# Altium PCB Relay 1.PcbDoc
Units mil, origin at the board's own origin, x right, y up, seen from the top; angles counter-clockwise.
Board outline 6702.94 x 3280.03 mil, 2 copper layers (Top Layer, Bottom Layer); 67 components, 114 nets, 294 pads, 0 vias.
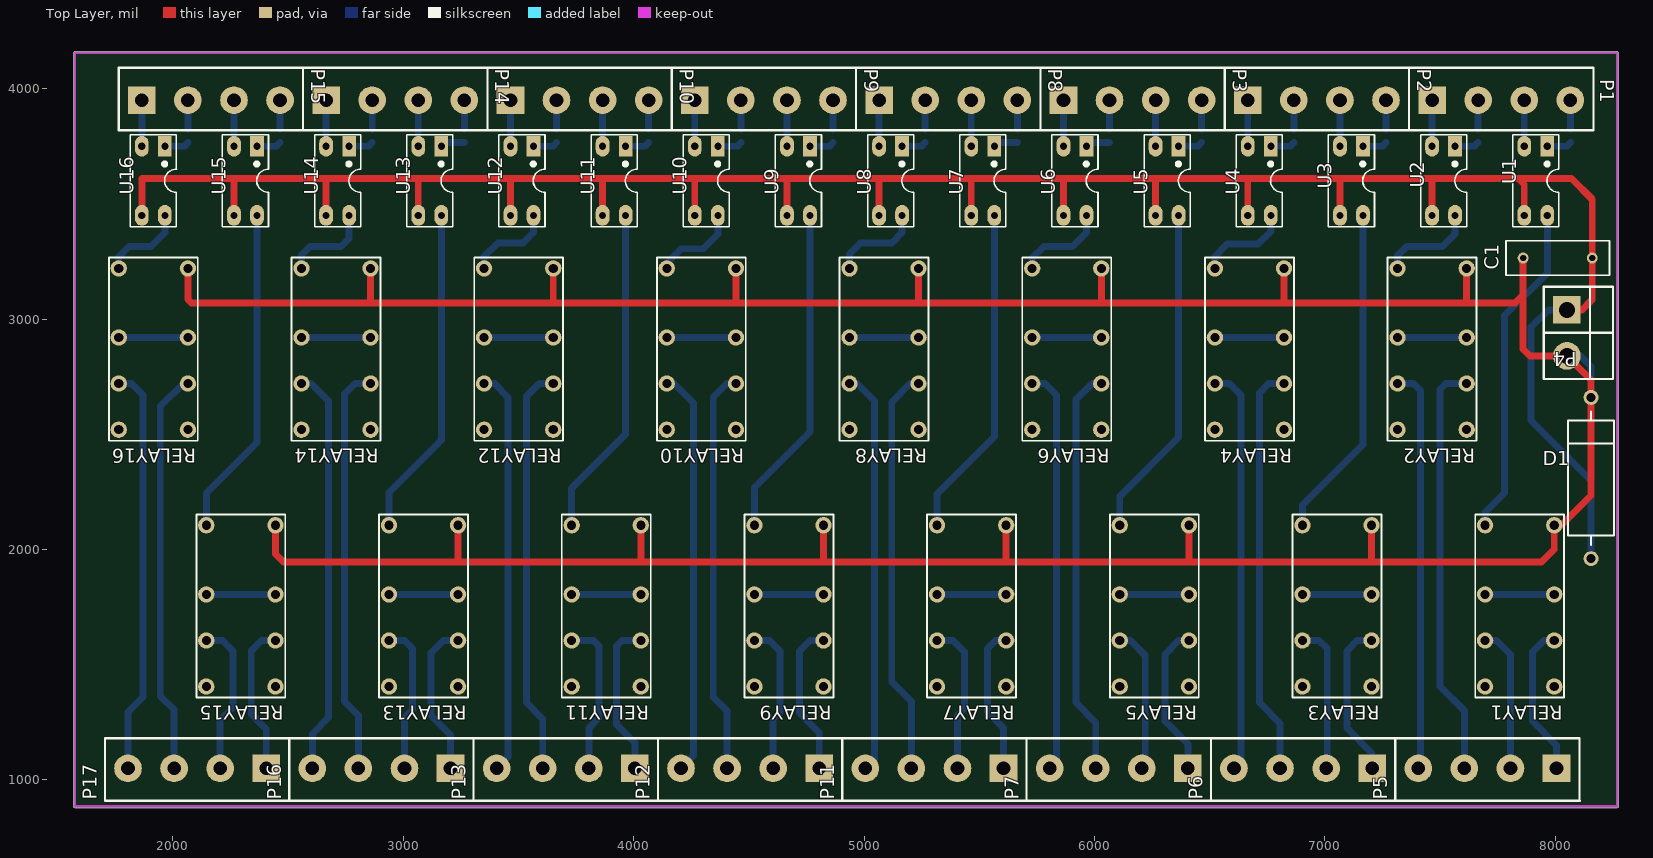
[diagram p0: Top Layer view]
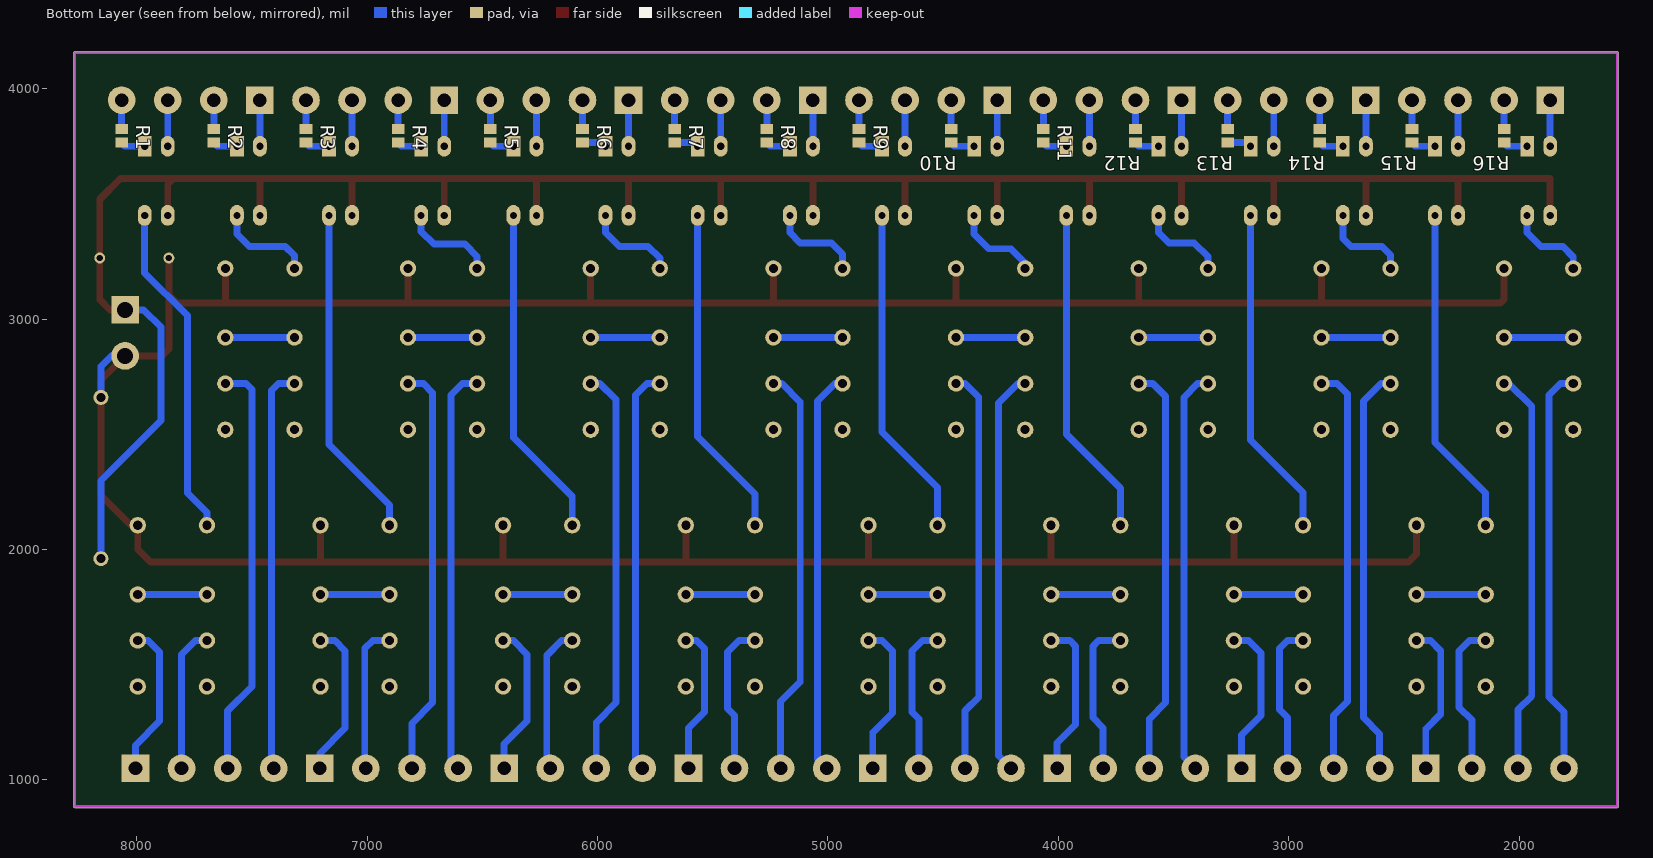
[diagram p1: Bottom Layer view, seen from below]

## Layer stack, top to bottom
Top Solder: solder mask 0.4, Solder Resist, Dk 3.5
Top Layer: signal copper 1.4
Dielectric 1: dielectric 12.6, FR-4, Dk 4.8
Bottom Layer: signal copper 1.4
Bottom Solder: solder mask 0.4, Solder Resist, Dk 3.5

## Board outline
1569.92,886.14 cw(c1574.8,887.28) 1569.79,887.28 1569.79,4155 cw(c1574.8,4155) 1574.8,4160.02 8267.72,4160.02 cw(c8267.72,4155) 8272.73,4155 8272.73,887.28 cw(c8267.72,887.28) 8272.6,886.14 cw(c8267.72,885) 8272.73,885 cw(c8267.72,885) 8267.72,879.99 1574.8,879.99 cw(c1574.8,885)

## Design rules (kind name [scope] priority, off if disabled: settings)
Clearance [All] p1: gap=10 ignorepadtopadclearanceinfootprint=FALSE except(0: Arc-Hole Track-Hole SMDPad-Hole THPad-Hole Via-Hole Fill-Hole Poly-Hole Region-Hole Text-Hole)
PolygonConnect [All] p1: connectstyle=Relief reliefconductorwidth=10 reliefentries=4 polygonreliefangle="90 Angle" airgapwidth=10
RoutingVias [All] p1: holewidth=28 width=50 viastyle="Through Hole" minholewidth=28 minwidth=50 maxholewidth=28 maxwidth=50
SolderMaskExpansion [All] p1: expansion=4
Width [All] p1: maxlimit=50 minlimit=10 preferedwidth=30
30 further rules are at their usual default settings.

## Components (designator, comment, footprint, x,y, rotation, side; value= is the part's Value field where it differs from the comment)
C1 "Cap" RAD-0.3 8010,3265 r180 top
D1 "D Zener" DIODE-0.7 8155,2310 r90 top
P1 "Header 4" CON4 7465,3950 r0 top
P2 "Header 4" CON4 6665,3950 r0 top
P3 "Header 4" CON4 5865,3950 r0 top
P4 "Header 2" CON2 8050,3040 r270 top
P5 "Header 4" CON4 8005,1050 r180 top
P6 "Header 4" CON4 7205,1050 r180 top
P7 "Header 4" CON4 6405,1050 r180 top
P8 "Header 4" CON4 5065,3950 r0 top
P9 "Header 4" CON4 4265,3950 r0 top
P10 "Header 4" CON4 3465,3950 r0 top
P11 "Header 4" CON4 5605,1050 r180 top
P12 "Header 4" CON4 4805,1050 r180 top
P13 "Header 4" CON4 4005,1050 r180 top
P14 "Header 4" CON4 2665,3950 r0 top
P15 "Header 4" CON4 1865,3950 r0 top
P16 "Header 4" CON4 3205,1050 r180 top
P17 "Header 4" CON4 2405,1050 r180 top
R1 "Res3" C0805 8065,3795 r270 bottom
R2 "Res3" C0805 7665,3795 r270 bottom
R3 "Res3" C0805 7265,3795 r270 bottom
R4 "Res3" C0805 6865,3795 r270 bottom
R5 "Res3" C0805 6465,3795 r270 bottom
R6 "Res3" C0805 6065,3795 r270 bottom
R7 "Res3" C0805 5665,3795 r270 bottom
R8 "Res3" C0805 5265,3795 r270 bottom
R9 "Res3" C0805 4865,3795 r270 bottom
R10 "Res3" C0805 4465,3795 r270 bottom
R11 "Res3" C0805 4065,3795 r270 bottom
R12 "Res3" C0805 3665,3795 r270 bottom
R13 "Res3" C0805 3265,3795 r270 bottom
R14 "Res3" C0805 2865,3795 r270 bottom
R15 "Res3" C0805 2465,3795 r270 bottom
R16 "Res3" C0805 2065,3795 r270 bottom
RELAY1 "RY12W-K" RY-Series 7695,2105 r270 top
RELAY2 "RY12W-K" RY-Series 7315,3220 r270 top
RELAY3 "RY12W-K" RY-Series 6902.14,2105 r270 top
RELAY4 "RY12W-K" RY-Series 6522.14,3220 r270 top
RELAY5 "RY12W-K" RY-Series 6109.29,2105 r270 top
RELAY6 "RY12W-K" RY-Series 5729.29,3220 r270 top
RELAY7 "RY12W-K" RY-Series 5316.43,2105 r270 top
RELAY8 "RY12W-K" RY-Series 4936.43,3220 r270 top
RELAY9 "RY12W-K" RY-Series 4523.57,2105 r270 top
RELAY10 "RY12W-K" RY-Series 4143.57,3220 r270 top
RELAY11 "RY12W-K" RY-Series 3730.71,2105 r270 top
RELAY12 "RY12W-K" RY-Series 3350.71,3220 r270 top
RELAY13 "RY12W-K" RY-Series 2937.86,2105 r270 top
RELAY14 "RY12W-K" RY-Series 2557.86,3220 r270 top
RELAY15 "RY12W-K" RY-Series 2145,2105 r270 top
RELAY16 "RY12W-K" RY-Series 1765,3220 r270 top
U1 "OPTO" DIP4/W0.3 7965,3750 r180 top
U2 "OPTO" DIP4/W0.3 7565,3750 r180 top
U3 "OPTO" DIP4/W0.3 7165,3750 r180 top
U4 "OPTO" DIP4/W0.3 6765,3750 r180 top
U5 "OPTO" DIP4/W0.3 6365,3750 r180 top
U6 "OPTO" DIP4/W0.3 5965,3750 r180 top
U7 "OPTO" DIP4/W0.3 5565,3750 r180 top
U8 "OPTO" DIP4/W0.3 5165,3750 r180 top
U9 "OPTO" DIP4/W0.3 4765,3750 r180 top
U10 "OPTO" DIP4/W0.3 4365,3750 r180 top
U11 "OPTO" DIP4/W0.3 3965,3750 r180 top
U12 "OPTO" DIP4/W0.3 3565,3750 r180 top
U13 "OPTO" DIP4/W0.3 3165,3750 r180 top
U14 "OPTO" DIP4/W0.3 2765,3750 r180 top
U15 "OPTO" DIP4/W0.3 2365,3750 r180 top
U16 "OPTO" DIP4/W0.3 1965,3750 r180 top

## Footprints (in the part's own frame and the unit in brackets; to place one, negate y for a bottom-side part, rotate by r counter-clockwise, add the part's x,y. Pads: shape width x height; smd on the part's side, far side on the other; paste and mask are expansions set on the pad)
C0805 [mm] "Chip Capacitor, Body 2.0x1.3mm, IPC High Density"
  rect 1.1x1.4 smd: 1(-0.75,0) 2(0.75,0)
  body extent -1.1,-0.72 1.1,0.72, height 1.4
CON2 [mil]
  rect 120x120 hole 70: 1(0,0)
  round 120 hole 70: 2(200,0)
  silkscreen extent -100,-100 300,200
CON4 [mil] "CON4 5.08"
  rect 120x120 hole 59.06: 1(0,0)
  round 120 hole 59.06: 2(200,0) 3(400,0) 4(600,0)
  silkscreen extent -101,-131 700,141
DIODE-0.7 [mm] "Diode, Thru-Hole; 2 Leads; 0.7 in Pin Spacing"
  round 1.65 hole 1: 1(-8.89,0) 2(8.89,0)
  silkscreen extent -7.37,-2.54 7.37,2.54
DIP4/W0.3 [mil] "4 PIN, W 300mil, Pin to pin 100mil"
  rect 60x90 hole 31: 1(0,0)
  oval 60x90 hole 31: 2(100,0) 3(100,300) 4(0,300)
  silkscreen extent -50,-50 150,350, body extent -59,-10 159,305, height 170
RAD-0.3 [mm] "Radial Cap, Thru-Hole; 2 Leads; 0.3 in Pin Spacing"
  round 1.2 hole 0.7: 1(-3.81,0) 2(3.81,0)
  silkscreen extent -5.71,-1.91 5.71,1.91
RY-Series [mm]
  round 1.8 hole 1: 1(0,0) 2(7.62,0) 3(12.7,0) 4(17.78,0) 5(17.78,7.62) 6(12.7,7.62) 7(7.62,7.62) 8(0,7.62)
  silkscreen extent -1.2,-1.09 19,8.71, body extent -1.16,-1.04 19.06,8.76, height 12.5

## Part data
C1: "Capacitor"
D1: "Zener Diode"
P1 P2 P3 P5 P6 P7 P8 P9 P10 P11 P12 P13 P14 P15 P16 P17: "Header, 4-Pin"
P4: "Header, 2-Pin"
R1 R2 R3 R4 R5 R6 R7 R8 R9 R10 R11 R12 R13 R14 R15 R16: "Resistor"
U1 U2 U3 U4 U5 U6 U7 U8 U9 U10 U11 U12 U13 U14 U15 U16: library part OPTO_PC817

## Nets (pads, with @x,y where several pads share a name; then routed paths per layer and width w, separated by ;. In a path a pad name is that pad's centre, name@x,y a point inside that pad or via, vN(x,y) a via of type N, cw(c..) or ccw(c..) an arc to the next point about the centre after c; other vN are vias at no path point)
GND: C1.1 D1.1 P4.1 U1.3 U2.3 U3.3 U4.3 U5.3 U6.3 U7.3 U8.3 U9.3 U10.3 U11.3 U12.3 U13.3 U14.3 U15.3 U16.3 | length 10720
  Top Layer w30: U16.3 1865,3610 3065,3610 ; U15.3 2265,3600 ; U14.3 2665,3605 ; U13.3 3065,3610 ; U12.3 3465,3610 ; U11.3 3865,3610 ; U10.3 4265,3605 ; U9.3 4665,3605 ; U8.3 5065,3605 ; U7.3 5465,3610 ; U6.3 5865,3605 ; U5.3 6265,3610 ; U4.3 6665,3610 ; U3.3 7065,3610 ; U2.3 7465,3600 ; U1.3 7865,3585 7840,3610 ; P4.1 8115,3040 8160,3085 C1.1 8160,3520 8070,3610 7840,3610 ; 3065,3610 3465,3610 ; 3465,3610 3865,3610 ; 3865,3610 5465,3610 ; 5465,3610 6265,3610 ; 6265,3610 6665,3610 ; 6665,3610 7065,3610 ; 7065,3610 7840,3610
  Bottom Layer w30: P4.1 7970,3040 7895,2965 7895,2560 8155,2300 D1.1
NetP1_1: P1.1 U2.2 | length 200
  Bottom Layer w30: U2.2 P1.1
NetP1_2: P1.2 R2.1 | length 125.5
  Bottom Layer w30: R2.1 P1.2
NetP1_3: P1.3 U1.2 | length 200
  Bottom Layer w30: U1.2 P1.3
NetP1_4: P1.4 R1.1 | length 125.5
  Bottom Layer w30: R1.1 P1.4
NetP2_1: P2.1 U4.2 | length 200
  Bottom Layer w30: U4.2 P2.1
NetP2_2: P2.2 R4.1 | length 125.5
  Bottom Layer w30: R4.1 P2.2
NetP2_3: P2.3 U3.2 | length 200
  Bottom Layer w30: U3.2 P2.3
NetP2_4: P2.4 R3.1 | length 125.5
  Bottom Layer w30: R3.1 P2.4
NetP3_1: P3.1 U6.2 | length 200
  Bottom Layer w30: U6.2 P3.1
NetP3_2: P3.2 R6.1 | length 125.5
  Bottom Layer w30: R6.1 P3.2
NetP3_3: P3.3 U5.2 | length 200
  Bottom Layer w30: U5.2 P3.3
NetP3_4: P3.4 R5.1 | length 125.5
  Bottom Layer w30: R5.1 P3.4
NetP5_1: P5.1 RELAY1.6 | length 664.2
  Bottom Layer w30: RELAY1.6 7950,1605 7900,1555 7900,1255 8005,1150 P5.1
NetP5_2: P5.2 RELAY1.3 | length 629.9
  Bottom Layer w30: RELAY1.3 7745,1605 7805,1545 P5.2
NetP5_3: P5.3 RELAY2.6 | length 1813.8
  Bottom Layer w30: P5.3 7605,1300 7500,1405 7500,2695 7525,2720 RELAY2.6
NetP5_4: P5.4 RELAY2.3 | length 1756.6
  Bottom Layer w30: RELAY2.3 7385,2720 7415,2690 7415,1060 P5.4
NetP6_1: P6.1 RELAY3.6 | length 681.3
  Bottom Layer w30: RELAY3.6 7140,1605 7095,1560 7095,1225 7205,1115 P6.1
NetP6_2: P6.2 RELAY3.3 | length 644.4
  Bottom Layer w30: RELAY3.3 6975,1605 7010,1570 7010,1055 P6.2
NetP6_3: P6.3 RELAY4.6 | length 1791
  Bottom Layer w30: P6.3 6805,1245 6715,1335 6715,2680 6755,2720 RELAY4.6
NetP6_4: P6.4 RELAY4.3 | length 1766
  Bottom Layer w30: RELAY4.3 6585,2720 6635,2670 6635,1080 P6.4
NetP7_1: P7.1 RELAY5.6 | length 665.6
  Bottom Layer w30: P7.1 6405,1155 6305,1255 6305,1545 6365,1605 RELAY5.6
NetP7_2: P7.2 RELAY5.3 | length 633.9
  Bottom Layer w30: RELAY5.3 6155,1605 6220,1540 6220,1065 P7.2
NetP7_3: P7.3 RELAY6.6 | length 1773.5
  Bottom Layer w30: P7.3 6005,1250 5920,1335 5920,2650 5990,2720 RELAY6.6
NetP7_4: P7.4 RELAY6.3 | length 1758.9
  Bottom Layer w30: RELAY6.3 5785,2720 5835,2670 5835,1080 P7.4
NetP8_1: P8.1 U8.2 | length 200
  Bottom Layer w30: U8.2 P8.1
NetP8_2: P8.2 R8.1 | length 125.5
  Bottom Layer w30: R8.1 P8.2
NetP8_3: P8.3 U7.2 | length 200
  Bottom Layer w30: U7.2 P8.3
NetP8_4: P8.4 R7.1 | length 125.5
  Bottom Layer w30: R7.1 P8.4
NetP9_1: P9.1 U10.2 | length 200
  Bottom Layer w30: U10.2 P9.1
NetP9_2: P9.2 R10.1 | length 125.5
  Bottom Layer w30: R10.1 P9.2
NetP9_3: P9.3 U9.2 | length 200
  Bottom Layer w30: U9.2 P9.3
NetP9_4: P9.4 R9.1 | length 125.5
  Bottom Layer w30: R9.1 P9.4
NetP10_1: P10.1 U12.2 | length 200
  Bottom Layer w30: U12.2 P10.1
NetP10_2: P10.2 R12.1 | length 125.5
  Bottom Layer w30: R12.1 P10.2
NetP10_3: P10.3 U11.2 | length 200
  Bottom Layer w30: U11.2 P10.3
NetP10_4: P10.4 R11.1 | length 125.5
  Bottom Layer w30: R11.1 P10.4
NetP11_1: P11.1 RELAY7.6 | length 644.9
  Bottom Layer w30: P11.1 5605,1225 5535,1295 5535,1570 5570,1605 RELAY7.6
NetP11_2: P11.2 RELAY7.3 | length 656.7
  Bottom Layer w30: RELAY7.3 5385,1605 5435,1555 5435,1310 5405,1280 P11.2
NetP11_3: P11.3 RELAY8.6 | length 1774.8
  Bottom Layer w30: P11.3 5205,1340 5120,1425 5120,2640 5200,2720 RELAY8.6
NetP11_4: P11.4 RELAY8.3 | length 1751.2
  Bottom Layer w30: RELAY8.3 4970,2720 5045,2645 5045,1090 P11.4
NetP12_1: P12.1 RELAY9.6 | length 667.4
  Bottom Layer w30: P12.1 4805,1205 4720,1290 4720,1560 4765,1605 RELAY9.6
NetP12_2: P12.2 RELAY9.3 | length 652.5
  Bottom Layer w30: RELAY9.3 4590,1605 4635,1560 4635,1295 4605,1265 P12.2
NetP12_3: P12.3 RELAY10.6 | length 1758.3
  Bottom Layer w30: P12.3 4405,1300 4345,1360 4345,2660 4405,2720 RELAY10.6
NetP12_4: P12.4 RELAY10.3 | length 1759.4
  Bottom Layer w30: RELAY10.3 4175,2720 4260,2635 4260,1105 P12.4
NetP13_1: P13.1 RELAY11.6 | length 679.2
  Bottom Layer w30: P13.1 4005,1160 3925,1240 3925,1580 3950,1605 RELAY11.6
NetP13_2: P13.2 RELAY11.3 | length 678.3
  Bottom Layer w30: RELAY11.3 3825,1605 3850,1580 3850,1270 3805,1225 P13.2
NetP13_3: P13.3 RELAY12.6 | length 1782.5
  Bottom Layer w30: P13.3 3605,1265 3535,1335 3535,2665 3590,2720 RELAY12.6
NetP13_4: P13.4 RELAY12.3 | length 1759.8
  Bottom Layer w30: RELAY12.3 3395,2720 3455,2660 3455,1100 P13.4
NetP14_1: P14.1 U14.2 | length 200
  Bottom Layer w30: U14.2 P14.1
NetP14_2: P14.2 R14.1 | length 125.5
  Bottom Layer w30: R14.1 P14.2
NetP14_3: P14.3 U13.2 | length 200
  Bottom Layer w30: U13.2 P14.3
NetP14_4: P14.4 R13.1 | length 125.5
  Bottom Layer w30: R13.1 P14.4
NetP15_1: P15.1 U16.2 | length 200
  Bottom Layer w30: U16.2 P15.1
NetP15_2: P15.2 R16.1 | length 125.5
  Bottom Layer w30: R16.1 P15.2
NetP15_3: P15.3 U15.2 | length 200
  Bottom Layer w30: U15.2 P15.3
NetP15_4: P15.4 R15.1 | length 125.5
  Bottom Layer w30: R15.1 P15.4
NetP16_1: P16.1 RELAY13.6 | length 675.8
  Bottom Layer w30: P16.1 3205,1195 3120,1280 3120,1550 3175,1605 RELAY13.6
NetP16_2: P16.2 RELAY13.3 | length 651.1
  Bottom Layer w30: RELAY13.3 3005,1605 3040,1570 3040,1305 3005,1270 P16.2
NetP16_3: P16.3 RELAY14.6 | length 1781.3
  Bottom Layer w30: P16.3 2805,1280 2745,1340 2745,2675 2790,2720 RELAY14.6
NetP16_4: P16.4 RELAY14.3 | length 1772.2
  Bottom Layer w30: RELAY14.3 2600,2720 2675,2645 2675,1270 2605,1200 P16.4
NetP17_1: P17.1 RELAY15.6 | length 660.6
  Bottom Layer w30: P17.1 2405,1220 2340,1285 2340,1560 2385,1605 RELAY15.6
NetP17_2: P17.2 RELAY15.3 | length 666.4
  Bottom Layer w30: RELAY15.3 2215,1605 2260,1560 2260,1315 2205,1260 P17.2
NetP17_3: P17.3 RELAY16.6 | length 1756.3
  Bottom Layer w30: P17.3 2005,1305 1945,1365 1945,2620 2045,2720 RELAY16.6
NetP17_4: P17.4 RELAY16.3 | length 1772.6
  Bottom Layer w30: RELAY16.3 1820,2720 1870,2670 1870,1360 1805,1295 P17.4
NetR1_2: R1.2 U1.1 | length 106.4
  Bottom Layer w30: U1.1 8049.53,3750 R1.2
NetR2_2: R2.2 U2.1 | length 106.4
  Bottom Layer w30: U2.1 7649.53,3750 R2.2
NetR3_2: R3.2 U3.1 | length 106.4
  Bottom Layer w30: U3.1 7249.53,3750 R3.2
NetR4_2: R4.2 U4.1 | length 106.4
  Bottom Layer w30: U4.1 6849.53,3750 R4.2
NetR5_2: R5.2 U5.1 | length 106.4
  Bottom Layer w30: U5.1 6449.53,3750 R5.2
NetR6_2: R6.2 U6.1 | length 106.4
  Bottom Layer w30: U6.1 5980.47,3765.47 R6.2
NetR7_2: R7.2 U7.1 | length 106.4
  Bottom Layer w30: U7.1 5580.47,3765.47 R7.2
NetR8_2: R8.2 U8.1 | length 106.4
  Bottom Layer w30: U8.1 5249.53,3750 R8.2
NetR9_2: R9.2 U9.1 | length 106.4
  Bottom Layer w30: U9.1 4849.53,3750 R9.2
NetR10_2: R10.2 U10.1 | length 106.4
  Bottom Layer w30: U10.1 4449.53,3750 R10.2
NetR11_2: R11.2 U11.1 | length 106.4
  Bottom Layer w30: U11.1 4049.53,3750 R11.2
NetR12_2: R12.2 U12.1 | length 106.4
  Bottom Layer w30: U12.1 3649.53,3750 R12.2
NetR13_2: R13.2 U13.1 | length 106.4
  Bottom Layer w30: U13.1 3180.47,3765.47 R13.2
NetR14_2: R14.2 U14.1 | length 106.4
  Bottom Layer w30: U14.1 2849.53,3750 R14.2
NetR15_2: R15.2 U15.1 | length 106.4
  Bottom Layer w30: U15.1 2449.53,3750 R15.2
NetR16_2: R16.2 U16.1 | length 106.4
  Bottom Layer w30: U16.1 2049.53,3750 R16.2
NetRELAY1_1: RELAY1.1 U1.4 | length 1456.8
  Bottom Layer w30: RELAY1.1 7695,2160 7780,2245 7780,3015 7965,3200 U1.4
NetRELAY1_2: RELAY1.2 RELAY1.7 | length 300
  Bottom Layer w30: RELAY1.2 RELAY1.7
NetRELAY2_1: RELAY2.1 U2.4 | length 424.4
  Bottom Layer w30: RELAY2.1 7315,3275 7355,3315 7510,3315 7565,3370 U2.4
NetRELAY2_2: RELAY2.2 RELAY2.7 | length 300
  Bottom Layer w30: RELAY2.2 RELAY2.7
NetRELAY3_1: RELAY3.1 U3.4 | length 1453.9
  Bottom Layer w30: RELAY3.1 6902.14,2192.14 7165,2455 U3.4
NetRELAY3_2: RELAY3.2 RELAY3.7 | length 300
  Bottom Layer w30: RELAY3.2 RELAY3.7
NetRELAY4_1: RELAY4.1 U4.4 | length 409.7
  Bottom Layer w30: RELAY4.1 6522.14,3272.14 6575,3325 6710,3325 6765,3380 U4.4
NetRELAY4_2: RELAY4.2 RELAY4.7 | length 300
  Bottom Layer w30: RELAY4.2 RELAY4.7
NetRELAY5_1: RELAY5.1 U5.4 | length 1450.9
  Bottom Layer w30: RELAY5.1 6109.29,2229.29 6365,2485 U5.4
NetRELAY5_2: RELAY5.2 RELAY5.7 | length 300
  Bottom Layer w30: RELAY5.2 RELAY5.7
NetRELAY6_1: RELAY6.1 U6.4 | length 400.9
  Bottom Layer w30: RELAY6.1 5729.29,3264.29 5780,3315 5905,3315 5965,3375 U6.4
NetRELAY6_2: RELAY6.2 RELAY6.7 | length 300
  Bottom Layer w30: RELAY6.2 RELAY6.7
NetRELAY7_1: RELAY7.1 U7.4 | length 1448
  Bottom Layer w30: RELAY7.1 5316.43,2241.43 5565,2490 U7.4
NetRELAY7_2: RELAY7.2 RELAY7.7 | length 300
  Bottom Layer w30: RELAY7.2 RELAY7.7
NetRELAY8_1: RELAY8.1 U8.4 | length 403.8
  Bottom Layer w30: RELAY8.1 4936.43,3281.43 4985,3330 5120,3330 5165,3375 U8.4
NetRELAY8_2: RELAY8.2 RELAY8.7 | length 300
  Bottom Layer w30: RELAY8.2 RELAY8.7
NetRELAY9_1: RELAY9.1 U9.4 | length 1445
  Bottom Layer w30: RELAY9.1 4523.57,2268.57 4765,2510 U9.4
NetRELAY9_2: RELAY9.2 RELAY9.7 | length 300
  Bottom Layer w30: RELAY9.2 RELAY9.7
NetRELAY10_1: RELAY10.1 U10.4 | length 377.4
  Bottom Layer w30: RELAY10.1 4143.57,3243.57 4205,3305 4300,3305 4365,3370 U10.4
NetRELAY10_2: RELAY10.2 RELAY10.7 | length 300
  Bottom Layer w30: RELAY10.2 RELAY10.7
NetRELAY11_1: RELAY11.1 U11.4 | length 1442
  Bottom Layer w30: RELAY11.1 3730.71,2265.71 3965,2500 U11.4
NetRELAY11_2: RELAY11.2 RELAY11.7 | length 300
  Bottom Layer w30: RELAY11.2 RELAY11.7
NetRELAY12_1: RELAY12.1 U12.4 | length 383.2
  Bottom Layer w30: RELAY12.1 3350.71,3270.71 3410,3330 3520,3330 3565,3375 U12.4
NetRELAY12_2: RELAY12.2 RELAY12.7 | length 300
  Bottom Layer w30: RELAY12.2 RELAY12.7
NetRELAY13_1: RELAY13.1 U13.4 | length 1439.1
  Bottom Layer w30: RELAY13.1 2937.86,2247.86 3165,2475 U13.4
NetRELAY13_2: RELAY13.2 RELAY13.7 | length 300
  Bottom Layer w30: RELAY13.2 RELAY13.7
NetRELAY14_1: RELAY14.1 U14.4 | length 394.9
  Bottom Layer w30: RELAY14.1 2557.86,3277.86 2595,3315 2730,3315 2765,3350 U14.4
NetRELAY14_2: RELAY14.2 RELAY14.7 | length 300
  Bottom Layer w30: RELAY14.2 RELAY14.7
NetRELAY15_1: RELAY15.1 U15.4 | length 1436.1
  Bottom Layer w30: RELAY15.1 2145,2245 2365,2465 U15.4
NetRELAY15_2: RELAY15.2 RELAY15.7 | length 300
  Bottom Layer w30: RELAY15.2 RELAY15.7
NetRELAY16_1: RELAY16.1 U16.4 | length 368.5
  Bottom Layer w30: RELAY16.1 1765,3270 1810,3315 1905,3315 1965,3375 U16.4
NetRELAY16_2: RELAY16.2 RELAY16.7 | length 300
  Bottom Layer w30: RELAY16.2 RELAY16.7
VCC: C1.2 D1.2 P4.2 RELAY1.8 RELAY2.8 RELAY3.8 RELAY4.8 RELAY5.8 RELAY6.8 RELAY7.8 RELAY8.8 RELAY9.8 RELAY10.8 RELAY11.8 RELAY12.8 RELAY13.8 RELAY14.8 RELAY15.8 RELAY16.8 | length 15429.3
  Top Layer w30: RELAY16.8 2065,3085 2080,3070 7825,3070 7860,3105 ; RELAY15.8 2445,1980 2480,1945 7202.14,1945 ; 2857.86,3077.86 RELAY14.8 ; 3237.86,1947.86 RELAY13.8 ; 3650.71,3080.71 RELAY12.8 ; 4030.71,1945.71 RELAY11.8 ; 4443.57,3078.57 RELAY10.8 ; 4823.57,1946.43 RELAY9.8 ; 5236.43,3076.43 RELAY8.8 ; 5616.43,1946.43 RELAY7.8 ; 6029.29,3074.29 RELAY6.8 ; 6409.29,1945.71 RELAY5.8 ; 6822.14,3077.14 RELAY4.8 ; RELAY3.8 7202.14,1945 ; 7615,3085 RELAY2.8 ; C1.2 7860,3105 ; 7202.14,1945 7940,1945 7995,2000 RELAY1.8 8025,2105 8155,2235 D1.2 8155,2735 P4.2 7890,2840 7860,2870 7860,3105
  Bottom Layer w30: P4.2 8110,2840 8155,2795 D1.2
pads on no net: RELAY1.4 RELAY1.5 RELAY2.4 RELAY2.5 RELAY3.4 RELAY3.5 RELAY4.4 RELAY4.5 RELAY5.4 RELAY5.5 RELAY6.4 RELAY6.5 RELAY7.4 RELAY7.5 RELAY8.4 RELAY8.5 RELAY9.4 RELAY9.5 RELAY10.4 RELAY10.5 RELAY11.4 RELAY11.5 RELAY12.4 RELAY12.5 RELAY13.4 RELAY13.5 RELAY14.4 RELAY14.5 RELAY15.4 RELAY15.5 RELAY16.4 RELAY16.5

## Keep-outs
Keep-Out Layer:
  lines w10: 1574.8,885 8267.72,885 ; 1574.8,887.28 1574.8,4155 8267.72,4155 8267.72,887.28